# EAGLE board usb415 (EAGLE 7.2.0)
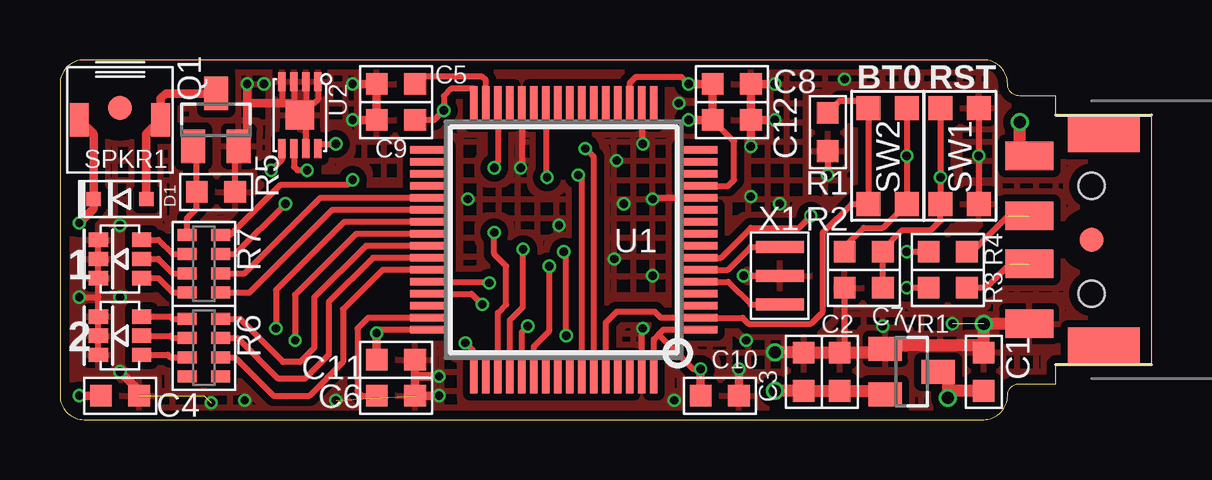
[diagram p0: board, top side]
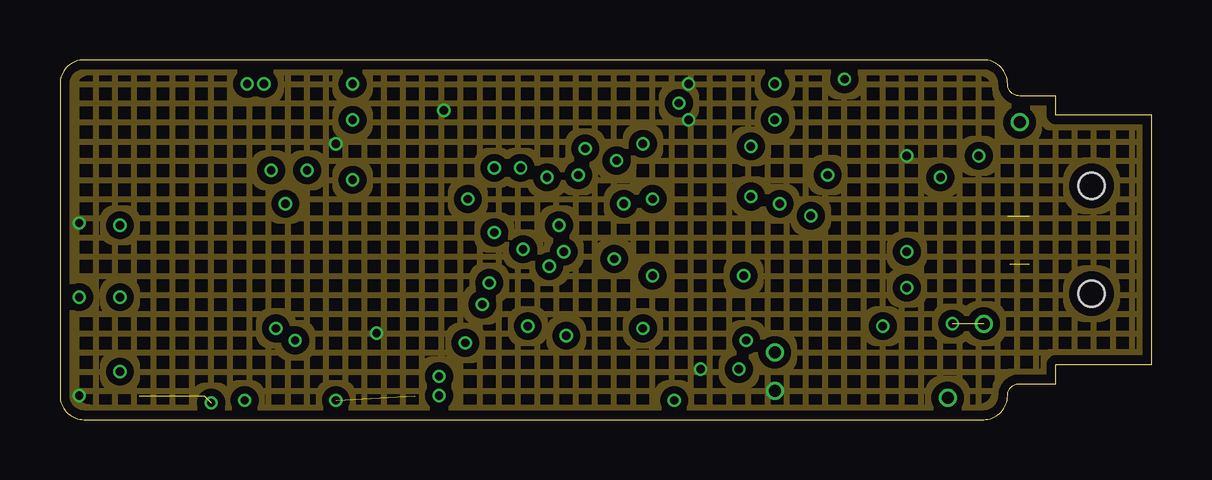
[diagram p1: board, inner layer Route2]
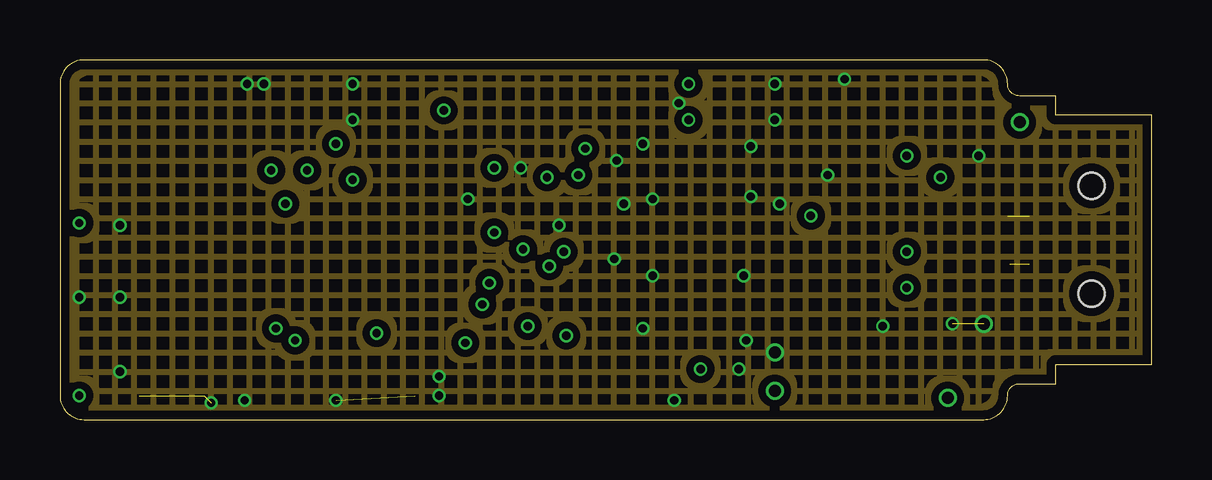
[diagram p2: board, inner layer Route15]
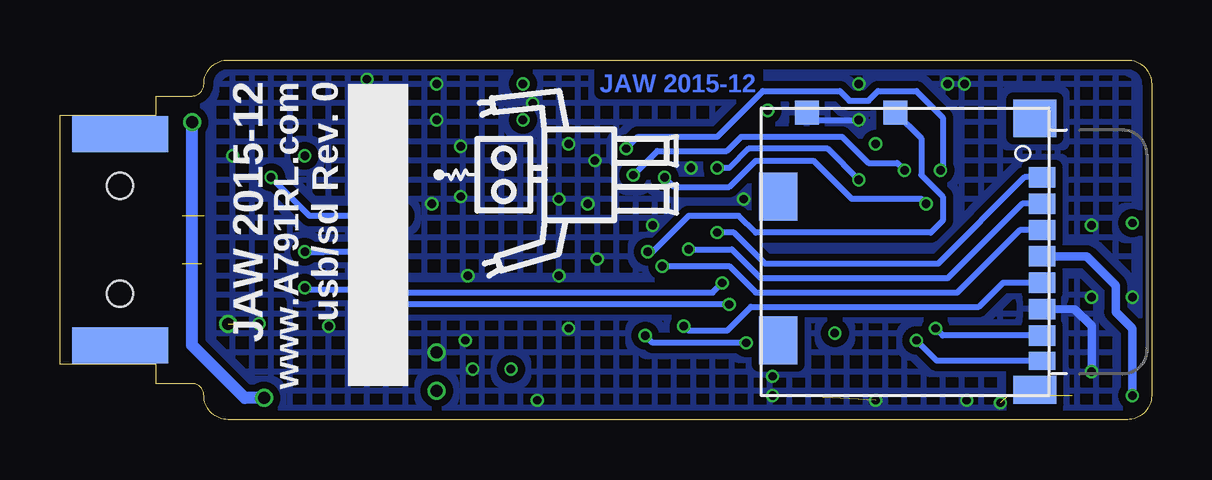
[diagram p3: board, bottom side, seen from below]

Size 45.5 x 15 mm. Coordinates in mm from the lower left corner, seen from the top.
Outline: 41.5,13.5 40,13.5 arc-90 39.5,14 arc90 38.5,15 1,15 arc90 0,14 0,1 arc90 1,0 38.5,0 arc90 39.5,1 arc-90 40,1.5 41.5,1.5 41.5,2.3 45.5,2.3 45.5,12.7 41.5,12.7 41.5,13.5
Copper layers (1*2*15*16): Top 0.035559375mm / dielectric 0.17018125mm / Route2 0.01778125mm / dielectric 47mil / Route15 0.01778125mm / dielectric 0.17018125mm / Bottom 0.035559375mm
Design rules "OSHPark-4layer *": minimum track width 5mil, minimum drill 10mil, track to track 7mil, track to pad 7mil, pad to pad 7mil, via to via 7mil, smd to smd 5mil, copper to edge 15mil, drill to drill 6mil, minimum pad ring 4mil, minimum via ring 4mil, stop-mask expansion 4mil, vias tented up to drill 0.5mm, thermal gap 10mil

## Footprints (pad centres in the part's own frame; a part is rotated, then mirrored left to right if it is on the bottom)
SMD0603 = smd 0.9 x 0.9: 1 -0.8,0; 2 0.8,0
MICROSD/MOLEX/FRONT/PLAIN = smd 0.85 x 1.1: 1 3.105,-4.43; 2 2.005,-4.43; 3 0.905,-4.43; 4 -0.195,-4.43; 5 -1.295,-4.43; 6 -2.395,-4.43; 7 -3.495,-4.43 | smd 0.75 x 1.1: 8 -4.545,-4.43 | smd 1.17 x 1.8: P$1 -5.755,-4.13 | smd 1.55 x 1.8: P$2 5.565,-4.13 | smd 2 x 1.6: P$3 -3.7,6.57; P$4 2.3,6.57 | smd 1 x 1: SW1 5.8,1.67; SW2 5.8,5.37
SOD-323 = smd 0.6 x 0.6: A 1.1,0; C -1.1,0
SMDLEDRGB = smd 0.8 x 0.6: AB 0.9,0.8; AG 0.9,-0.8; AR 0.9,0; CB -0.9,0.8; CG -0.9,-0.8; CR -0.9,0
SOT-23 = smd 1 x 1.4: 1 -0.95,-1.1; 2 0.95,-1.1; 3 0,1.1
SMD-0603-ARV = smd 0.5 x 0.8: 1 -1.2,-0.7; 2 -0.4,-0.7; 3 0.4,-0.7; 4 1.2,-0.7; 5 1.2,0.7; 6 0.4,0.7; 7 -0.4,0.7; 8 -1.2,0.7
PUI-0440 = smd 0.8 x 1.4: P$1 -1.7,0; P$2 1.7,0
KMR211 = smd 1 x 1: 1 -2,0.8; 2 -2,-0.8; 3 2,0.8; 4 2,-0.8
TQFP64 = smd 0.3 x 1.6: 1 -3.75,-5.6; 2 -3.25,-5.6; 3 -2.75,-5.6; 4 -2.25,-5.6; 5 -1.75,-5.6; 6 -1.25,-5.6; 7 -0.75,-5.6; 8 -0.25,-5.6; 9 0.25,-5.6; 10 0.75,-5.6; 11 1.25,-5.6; 12 1.75,-5.6; 13 2.25,-5.6; 14 2.75,-5.6; 15 3.25,-5.6; 16 3.75,-5.6; 33 3.75,5.6; 34 3.25,5.6; 35 2.75,5.6; 36 2.25,5.6; 37 1.75,5.6; 38 1.25,5.6; 39 0.75,5.6; 40 0.25,5.6; 41 -0.25,5.6; 42 -0.75,5.6; 43 -1.25,5.6; 44 -1.75,5.6; 45 -2.25,5.6; 46 -2.75,5.6; 47 -3.25,5.6; 48 -3.75,5.6 | smd 1.6 x 0.3: 17 5.6,-3.75; 18 5.6,-3.25; 19 5.6,-2.75; 20 5.6,-2.25; 21 5.6,-1.75; 22 5.6,-1.25; 23 5.6,-0.75; 24 5.6,-0.25; 25 5.6,0.25; 26 5.6,0.75; 27 5.6,1.25; 28 5.6,1.75; 29 5.6,2.25; 30 5.6,2.75; 31 5.6,3.25; 32 5.6,3.75; 49 -5.6,3.75; 50 -5.6,3.25; 51 -5.6,2.75; 52 -5.6,2.25; 53 -5.6,1.75; 54 -5.6,1.25; 55 -5.6,0.75; 56 -5.6,0.25; 57 -5.6,-0.25; 58 -5.6,-0.75; 59 -5.6,-1.25; 60 -5.6,-1.75; 61 -5.6,-2.25; 62 -5.6,-2.75; 63 -5.6,-3.25; 64 -5.6,-3.75
TDFN8EPW = smd 0.8 x 0.3: 1 -1.4,0.75; 2 -1.4,0.25; 3 -1.4,-0.25; 4 -1.4,-0.75; 5 1.4,-0.75; 6 1.4,-0.25; 7 1.4,0.25; 8 1.4,0.75 | smd 1.2 x 1.2: PAD 0,0
FIDUCIAL_1MM = smd 1 x 1: 1 0,0
SOT-23-3 = smd 1 x 1.4: 1 -0.95,-1.1; 2 0.95,-1.1; 3 0,1.1
RESONATOR-CSTCE = smd 0.5 x 2: 1 -1.2,0; 2 0,0; 3 1.2,0
MOLEX_480371000 = smd 1.2 x 2: 1 3.5,2.6; 2 1,2.6; 3 -1,2.6; 4 -3.5,2.6 | smd 1.5 x 4 bottom: P$1 -4.4,0; P$2 4.4,0 | smd 1.5 x 3: P$3 -4.4,-0.5; P$4 4.4,-0.5 | hole 1.1: -2.25,0; 2.25,0

## Placement (x,y rotation side)
C1  1u  [SMD0603]  38.5,2 90 top
C2  1u  [SMD0603]  32.5,2 90 top
C3  10u  [SMD0603]  31,2 90 top
C4  4u7  [SMD0603]  2.5,1 0 top
C5  2u2  [SMD0603]  14,14 180 top
C6  2u2  [SMD0603]  14,1 0 top
C7  .1u  [SMD0603]  33.5,5.5 180 top
C8  .1u  [SMD0603]  28,14 0 top
C9  .1u  [SMD0603]  14,12.5 180 top
C10  .1u  [SMD0603]  27.5,1 0 top
C11  4u7  [SMD0603]  14,2.5 0 top
C12  .1u  [SMD0603]  28,12.5 0 top
CN1  MICROSDPLAIN  [MICROSD/MOLEX/FRONT/PLAIN]  9,7 90 bottom
D1  any  [SOD-323]  2.5,9.2 0 top
LED1  LED_RGB3  [SMDLEDRGB]  2.5,6.7 0 top
LED2  LED_RGB3  [SMDLEDRGB]  2.5,3.5 0 top
Q1  IRLML6344TRPBF  [SOT-23]  6.5,12.5 0 top
R1  10k  [SMD0603]  32,12 90 top
R2  10k  [SMD0603]  33.5,7 180 top
R3  22  [SMD0603]  37,5.5 180 top
R4  22  [SMD0603]  37,7 180 top
R5  1M  [SMD0603]  6.5,9.5 0 top
R6  470  [SMD-0603-ARV]  6,3 90 top
R7  470  [SMD-0603-ARV]  6,6.5 90 top
SPKR1  SPKR-PUI-0440  [PUI-0440]  2.5,12.5 0 top
SW1  SWITCHKMR211  [KMR211]  37.5,11 270 top
SW2  SWITCHKMR211  [KMR211]  34.5,11 270 top
U1  STM32F4/64  [TQFP64]  21,7.5 90 top
U2  EEPROM-I2C-8-DFN8W  [TDFN8EPW]  10,12.7 270 top
U$1  ROBOTMAN-LOGO  [ROBOTMAN-LOGO]  24.1,10.21 90 bottom
U$2  FIDUCIAL  [FIDUCIAL_1MM]  2.5,13 0 top
U$3  FIDUCIAL  [FIDUCIAL_1MM]  43,7.5 0 top
VR1  mcp1700 /3v3  [SOT-23-3]  35.5,2 270 top
X1  12MHz  [RESONATOR-CSTCE]  30,6 90 top
X2  USB-A  [MOLEX_480371000]  43,7.5 90 top

## Library data of the parts
C1-C12 CN1 D1 LED1 LED2 Q1 R1-R7 SPKR1 SW1 SW2 U1 U2 U$1 VR1 X1 X2 = jaw
U$2 U$3 = adafruit

## Nets
BOOT0: R1.2 SW2.2 SW2.4 U1.2 U1.60
GND: C1.2 C2.2 C3.2 C4.2 C5.2 C6.2 C7.2 C8.2 C9.2 C10.2 C11.2 C12.2 CN1.6 CN1.SW2 LED1.CB LED1.CG LED1.CR LED2.CB LED2.CG LED2.CR Q1.2 R1.1 R5.2 SW1.1 SW1.3 U1.12 U1.18 U1.28 U1.63 U2.1 U2.2 U2.3 U2.4 U2.7 U2.PAD VR1.1 X1.2 X2.4
I2CCL: U1.58 U2.6
I2CDA: U1.59 U2.5
IOCARD: CN1.SW1 U1.49
IOLED0: R6.2 U1.43
IOLED1: R6.3 U1.42
IOLED2: R6.4 U1.41
IOLED3: R7.1 U1.38
IOLED4: R7.2 U1.37
IOLED5: R7.3 U1.26
IOSPKR: R7.4 U1.30
N$1: LED1.AG R7.8
N$2: LED1.AR R7.7
N$3: LED1.AB R7.6
N$4: C6.1 U1.47
N$5: LED2.AG R6.7
N$6: LED2.AR R6.6
N$7: R4.1 X2.2
N$8: R3.1 X2.3
N$9: Q1.1 R5.1 R7.5
N$10: LED2.AB R6.5
N$12: U1.5 X1.1
N$13: U1.6 X1.3
N$14: D1.A Q1.3 SPKR1.P$2
N$18: C5.1 U1.31
NRST: C7.1 R2.1 SW1.2 SW1.4 U1.7
SDIOCLK: CN1.5 U1.53
SDIOCMD: CN1.3 U1.54
SDIOD0: CN1.7 U1.39
SDIOD1: CN1.8 U1.40
SDIOD2: CN1.1 U1.51
SDIOD3: CN1.2 U1.52
USBDM: R4.2 U1.44
USBDP: R3.2 U1.45
VCC: C2.1 C3.1 C4.1 C8.1 C9.1 C10.1 C11.1 C12.1 CN1.4 D1.C R2.2 SPKR1.P$1 SW2.1 SW2.3 U1.1 U1.13 U1.19 U1.32 U1.48 U1.64 U2.8 VR1.2
VUSB: C1.1 VR1.3 X2.1

## Tracks (layer width: path | path; a pad name or v marks a point on that pad's centre or on a via)
BOOT0
  Top 0.25: R1.2 32.5,13.3 33.4,13.3 SW2.2 SW2.4 33,9 31.8,7.8 31.8,4.5 31.3,4 28.7,4 28.45,4.25 U1.2 25.05,4.25 24.8,4.5 23.2,4.5 22.75,4.05 U1.60
GND  (via drill 0.35, 0.5)  (4 unrouted)
  Top 0.25: SW1.1 v38.3,11 SW1.3 | R1.1 v32,10.2 | C7.2 32.7,3 C2.2 | X1.2 v28.5,6 | 14.8,2.4 C11.2 | U1.63 24.25,3.75 v24.3,3.8 | U1.28 19.25,10.55 v19.2,10.5 | U1.18 24.25,11.55 v24.3,11.5 | U1.12 24.75,9.25 v24.7,9.2 | R5.2 7.3,11.25 Q1.2 7.8,11.75 | 7.8,12.9 7.8,13.2 | LED2.CG LED2.CR LED2.CB 1.6,5.1 | 1.6,5.1 LED1.CG LED1.CR LED1.CB | v0.8,5.1 1.6,5.1 | U2.1 10.75,13.35 10.6,13.2 | 10.6,13.2 10.3,13.2 | 10.3,13.2 10.25,13.2 | 10.25,13.2 9.7,13.2 9.75,13.05 U2.3 | U2.2 10.25,13.2 | 10.25,13.2 10.25,13.05 10.3,13.2 | U2.4 9.25,13.25 9.2,13.2 | U2.7 10.25,13.2 | 10.25,13.2 10.6,13.2
  Top 0.35: 14.8,1.8 C6.2 v15.8,1 | 14.8,1.8 14.8,2.4 | v12.2,14 C5.2 C9.2 v12.2,12.5 | C10.2 v28.3,2.1 | C12.2 C8.2 v29.8,14 | C12.2 v29.8,12.5 | 7.8,11.75 7.8,12.9 7.8,13.2 | 7.8,13.2 v7.8,14 | v28.8,11.4 C12.2 | 9.7,13.2 9.2,13.2 7.8,13.2 | C4.2 3.3,1.2 v2.5,2 | v15.8,1.8 14.8,1.8
  Top 0.5: VR1.1 34.25,2.8 C2.2 C3.2 v29.8,2.8 | X2.4 v38.5,4 38.5,3.5 C1.2 38.5,3.1 34.5,3.1
  Bottom 0.25: CN1.SW2 14.07,12.5 v12.2,12.5
  Bottom 0.35: CN1.6 3.2,4.6 2.5,3.9 2.5,2.6 v2.5,2
  other vias: 6.3,0.7 37.2,4 28.6,3.3 30,9 11.5,0.8 17,9.2 23.2,10.8 24.7,6 23.5,9 20.8,8.1 25.8,13.2 28.8,9.3 32.7,14.2 25.6,0.8 34.3,3.9 23.1,6.7 2.5,8.1 2.5,5.1 8.5,14 7.7,0.8
  pour Route15 (isolate 0.3, hatched): -0.2,15 39.6,15 39.6,13.5 45.7,13.5 45.7,1.5 39.6,1.5 39.6,0 -0.2,0
  pour Bottom (isolate 0.3, hatched): -0.2,15 39.6,15 39.6,13.5 45.7,13.5 45.7,1.5 39.6,1.5 39.6,0 -0.2,0
  pour Top (isolate 0.3, rank 5, hatched): -0.2,15 39.6,15 39.6,13.5 45.7,13.5 45.7,1.5 39.6,1.5 39.6,0 -0.2,0
I2CCL  (via drill 0.35)
  Top 0.25: U1.58 21.75,10.05 v21.6,10.2 | U2.6 9.75,10.55 9.9,10.4 v10.3,10.4
  Bottom 0.25: v21.6,10.2 20.6,11.2 17.7,11.2 17.1,11.8 12.9,11.8 11.8,10.7 10.6,10.7 v10.3,10.4
I2CDA  (via drill 0.35)
  Top 0.25: U1.59 22.25,10.95 v21.9,11.3 | U2.5 9.25,10.85 v8.8,10.4
  Bottom 0.25: v21.9,11.3 21.4,11.8 18.1,11.8 16.2,13.7 13,13.7 12.6,13.3 11.8,13.3 11.4,13.7 9.8,13.7 8.7,12.6 8.7,10.5 v8.8,10.4
IOCARD  (via drill 0.35)
  Top 0.25: U1.49 17.25,2.75 17.2,2.9 v16.9,3.2 | v21.1,3.5 21.1,6.9 v21,7
  Bottom 0.25: CN1.SW1 9.6,11.73 9.6,10.2 8.7,9.3 8.7,8.3 9.2,7.8 16.5,7.8 17.2,8.5 19.3,8.5 20.8,7 v21,7 | v16.9,3.2 20.8,3.2 v21.1,3.5
IOLED0
  Top 0.25: U1.43 13.45,6.25 11.8,4.6 11.8,2.4 10.4,1 8.9,1 7.3,2.6 R6.2
IOLED1
  Top 0.25: U1.42 13.05,6.75 11.2,4.9 11.2,2.7 10.2,1.7 9.1,1.7 7.4,3.4 R6.3
IOLED2
  Top 0.25: U1.41 12.75,7.25 10.6,5.1 10.6,3 10,2.4 9.3,2.4 7.5,4.2 R6.4
IOLED3
  Top 0.25: U1.38 11.35,8.75 8.1,5.5 7.9,5.3 R7.1
IOLED4
  Top 0.25: U1.37 10.85,9.25 8.6,7 7.7,6.1 R7.2
IOLED5  (via drill 0.35)
  Top 0.25: U1.26 20.25,10.15 v20.3,10.1 | R7.3 7.3,6.9 v9.4,9
  Bottom 0.25: v9.4,9 9.6,9.2 12.5,9.2 14.1,10.8 16.5,10.8 17.6,9.7 19.9,9.7 v20.3,10.1
IOSPKR  (via drill 0.35)
  Top 0.25: U1.30 18.25,10.75 v18.1,10.5 | R7.4 7.1,7.7 9.2,9.8 12,9.8 v12.2,10
  Bottom 0.25: v12.2,10 13.5,11.3 16.8,11.3 17.6,10.5 v18.1,10.5
N$1
  Top 0.25: LED1.AG 4.1,5.9 4.7,5.3 R7.8
N$2
  Top 0.25: LED1.AR 4.1,6.7 4.7,6.1 R7.7
N$3
  Top 0.25: LED1.AB 4.1,7.5 4.7,6.9 R7.6
N$4
  Top 0.25: U1.47 12.85,4.25 12.4,3.8 12.4,1.2 12.6,1 C6.1
N$5
  Top 0.25: LED2.AG 4.5,2.7 4.6,2.6 R6.7
N$6
  Top 0.25: LED2.AR 4.6,3.5 4.7,3.4 R6.6
N$7  (1 unrouted)
  Top 0.25: 39.5,8.5 38,7 R4.1
N$8  (1 unrouted)
  Top 0.25: 39.6,6.5 38.6,5.5 R3.1
N$9
  Top 0.25: Q1.1 5.7,11.25 R5.1 5.7,8.8 5.3,8.4 R7.5
N$10
  Top 0.25: LED2.AB 4.6,4.3 4.7,4.2 R6.5
N$12
  Top 0.25: U1.5 27.85,5.75 28.8,4.8 X1.1
N$13
  Top 0.25: U1.6 27.85,6.25 28.8,7.2 X1.3
N$14
  Top 0.35: D1.A 3.6,11.9 SPKR1.P$2 4.2,13.4 4.4,13.6 Q1.3
N$18
  Top 0.25: U1.31 17.75,14.15 17.6,14.3 15.1,14.3 C5.1
NRST  (via drill 0.35)
  Top 0.25: SW1.2 v36.7,10.1 | v36.7,10.1 36.7,9.7 | 36.7,9.7 SW1.4 36.7,8.3 36.3,7.9 35.1,7.9 34.3,7.1 R2.1 C7.1 | U1.7 27.55,6.75 28.8,8 30.8,8 v31.3,8.5 | v36.7,10.1 36.7,9.7
  Bottom 0.25: v31.3,8.5 35.1,8.5 v36.7,10.1
SDIOCLK  (via drill 0.35)
  Top 0.25: U1.53 19.25,3.65 v19.5,3.9
  Bottom 0.25: v19.5,3.9 19.3,3.7 17.7,3.7 16.7,4.7 7.2,4.7 6.2,5.71 CN1.5
SDIOCMD  (via drill 0.35)
  Top 0.25: U1.54 19.75,3.05 20.4,3.7 v20.4,6.4
  Bottom 0.25: v20.4,6.4 17.6,6.4 16.5,5.3 8.1,5.3 5.49,7.91 CN1.3
SDIOD0  (via drill 0.35)
  Top 0.25: U1.39 11.85,8.25 9,5.4 v9,3.8
  Bottom 0.25: CN1.7 8.7,3.51 v9,3.8
SDIOD1  (via drill 0.35)
  Top 0.25: U1.40 12.35,7.75 9.8,5.2 v9.8,3.3
  Bottom 0.25: CN1.8 8.95,2.46 v9.8,3.3
SDIOD2  (via drill 0.35)
  Top 0.25: v18.1,7.8 18.1,6.9 18.25,6.75 18.6,6.4 18.6,4.8 18.25,4.45 U1.51
  Bottom 0.25: v18.1,7.8 17.9,7.8 17.4,7.8 16.1,6.5 8.9,6.5 5.29,10.11 CN1.1
SDIOD3  (via drill 0.35)
  Top 0.25: U1.52 18.75,4.15 19.3,4.7 19.3,6.9 v19.3,7.1
  Bottom 0.25: v19.3,7.1 17.5,7.1 16.3,5.9 8.5,5.9 5.39,9 CN1.2
USBDM  (via drill 0.35)
  Top 0.25: R4.2 v35.3,7 | U1.44 17.85,5.75 v17.9,5.7
  Bottom 0.25: 34.5,7 v35.3,7 33.1,7 31.4,5.3 18.3,5.3 v17.9,5.7
USBDP  (via drill 0.35)
  Top 0.25: R3.2 v35.3,5.5 | U1.45 17.15,5.25 v17.6,4.8
  Bottom 0.25: v35.3,5.5 35.2,5.4 32.7,5.4 32.6,5.4 32,4.8 17.8,4.8 v17.6,4.8
VCC  (via drill 0.35, 0.5)
  Top 0.25: SW2.1 v35.3,11 SW2.3 34.3,8 33.5,8 32.7,7.2 R2.2 | U1.32 17.25,13.8 16.3,13.8 16,13.5 v16,12.9 15.6,12.5 C9.1 | U1.48 13.65,3.75 13.35,3.75 v13.2,3.6 | U1.64 24.75,3.35 24.95,3.55 | 24.95,3.55 25.1,3.7 25.15,3.75 U1.1 | v26.7,2.1 26.4,2.1 24.95,3.55 | U1.13 27.85,9.75 28.1,10 28.1,11.6 C12.1 | U1.19 23.75,14.05 24,14.3 25.9,14.3 v26.2,14 | U2.8 10.75,11.55 10.8,11.5 v11.5,11.5
  Top 0.35: C11.1 13.2,3.3 v13.2,3.6 | C10.1 v26.7,2.1 | v26.2,14 C8.1 C12.1 v26.2,12.5 | SPKR1.P$1 1.4,11.9 D1.C 1.4,8.8 v0.8,8.2 | v0.8,1 C4.1
  Top 0.5: VR1.2 34.25,1.2 C2.1 C3.1 v29.8,1.2
  Bottom 0.35: CN1.4 2.7,6.8 1.5,5.6 1.5,4.5 0.8,3.8 v0.8,1
  pour Route2 (isolate 0.3, hatched): -0.2,15 39.6,15 39.6,13.5 45.7,13.5 45.7,1.5 39.6,1.5 39.6,0 -0.2,0
VUSB  (via drill 0.5)
  Top 0.5: C1.1 37.3,1.2 v37,0.9 37,1.6 VR1.3 | X2.1 40,11 v40,12.4
  Bottom 0.5: v37,0.9 37.8,0.9 40,3.1 40,9.2 v40,12.4

## Text on the board
Bottom: JAW 2015-12
tPlace: BT0 | RST | 1 | 2
bPlace: usb/sd Rev. 0 | www.A791RL.com | JAW 2015-12
bStop: JAW 2015-12